# Altium PCB HEAD_HEATER_CTRL_2CH.PcbDoc
Units mm, origin at the board's own origin, x right, y up, seen from the top; angles counter-clockwise.
Board outline 65 x 60 mm, 2 copper layers (Top Layer, Bottom Layer); 46 components, 24 nets, 116 pads, 44 vias.
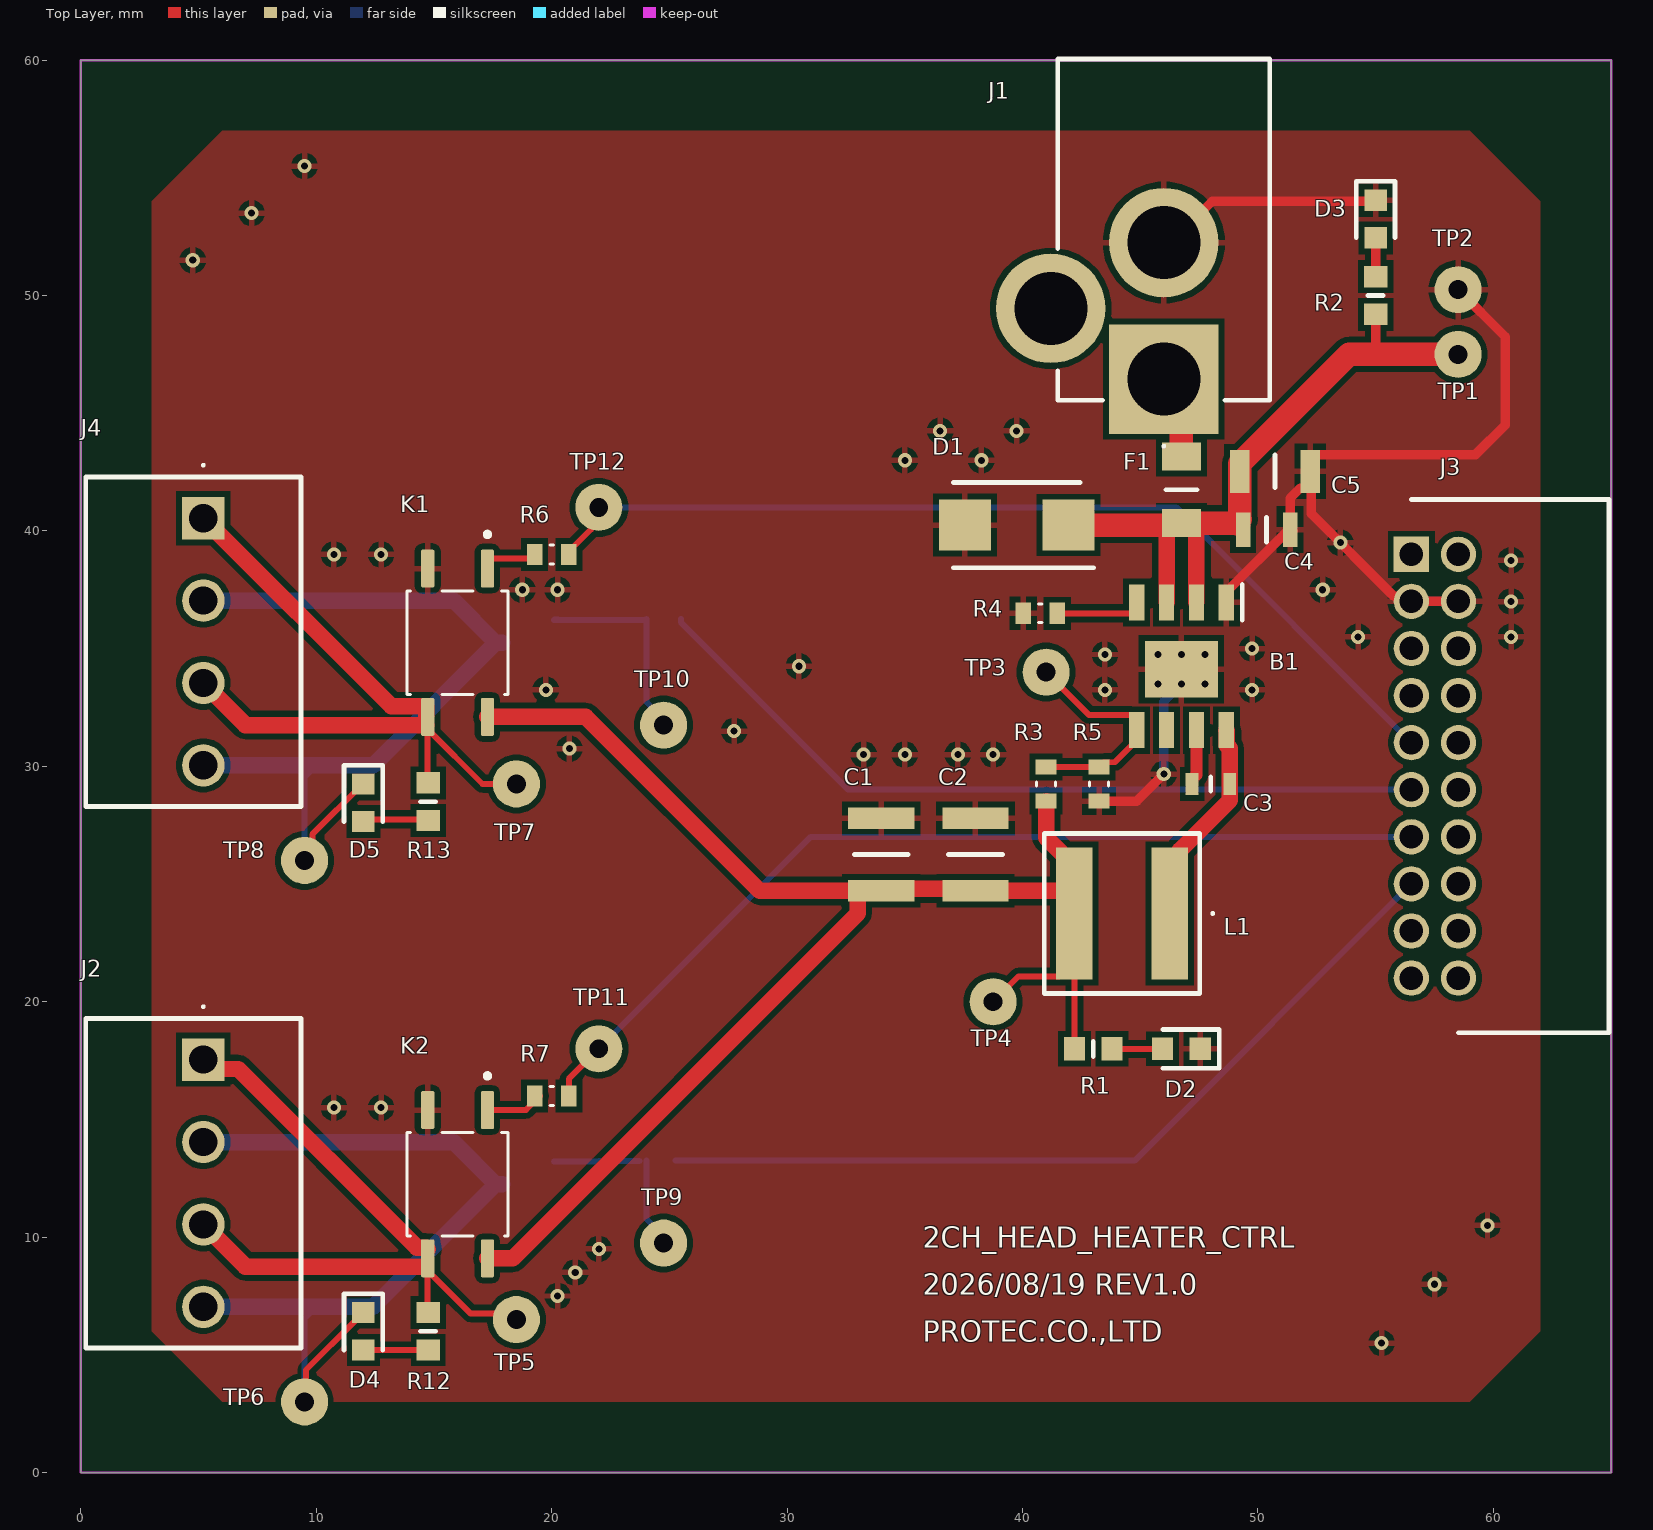
[diagram p0: Top Layer view]
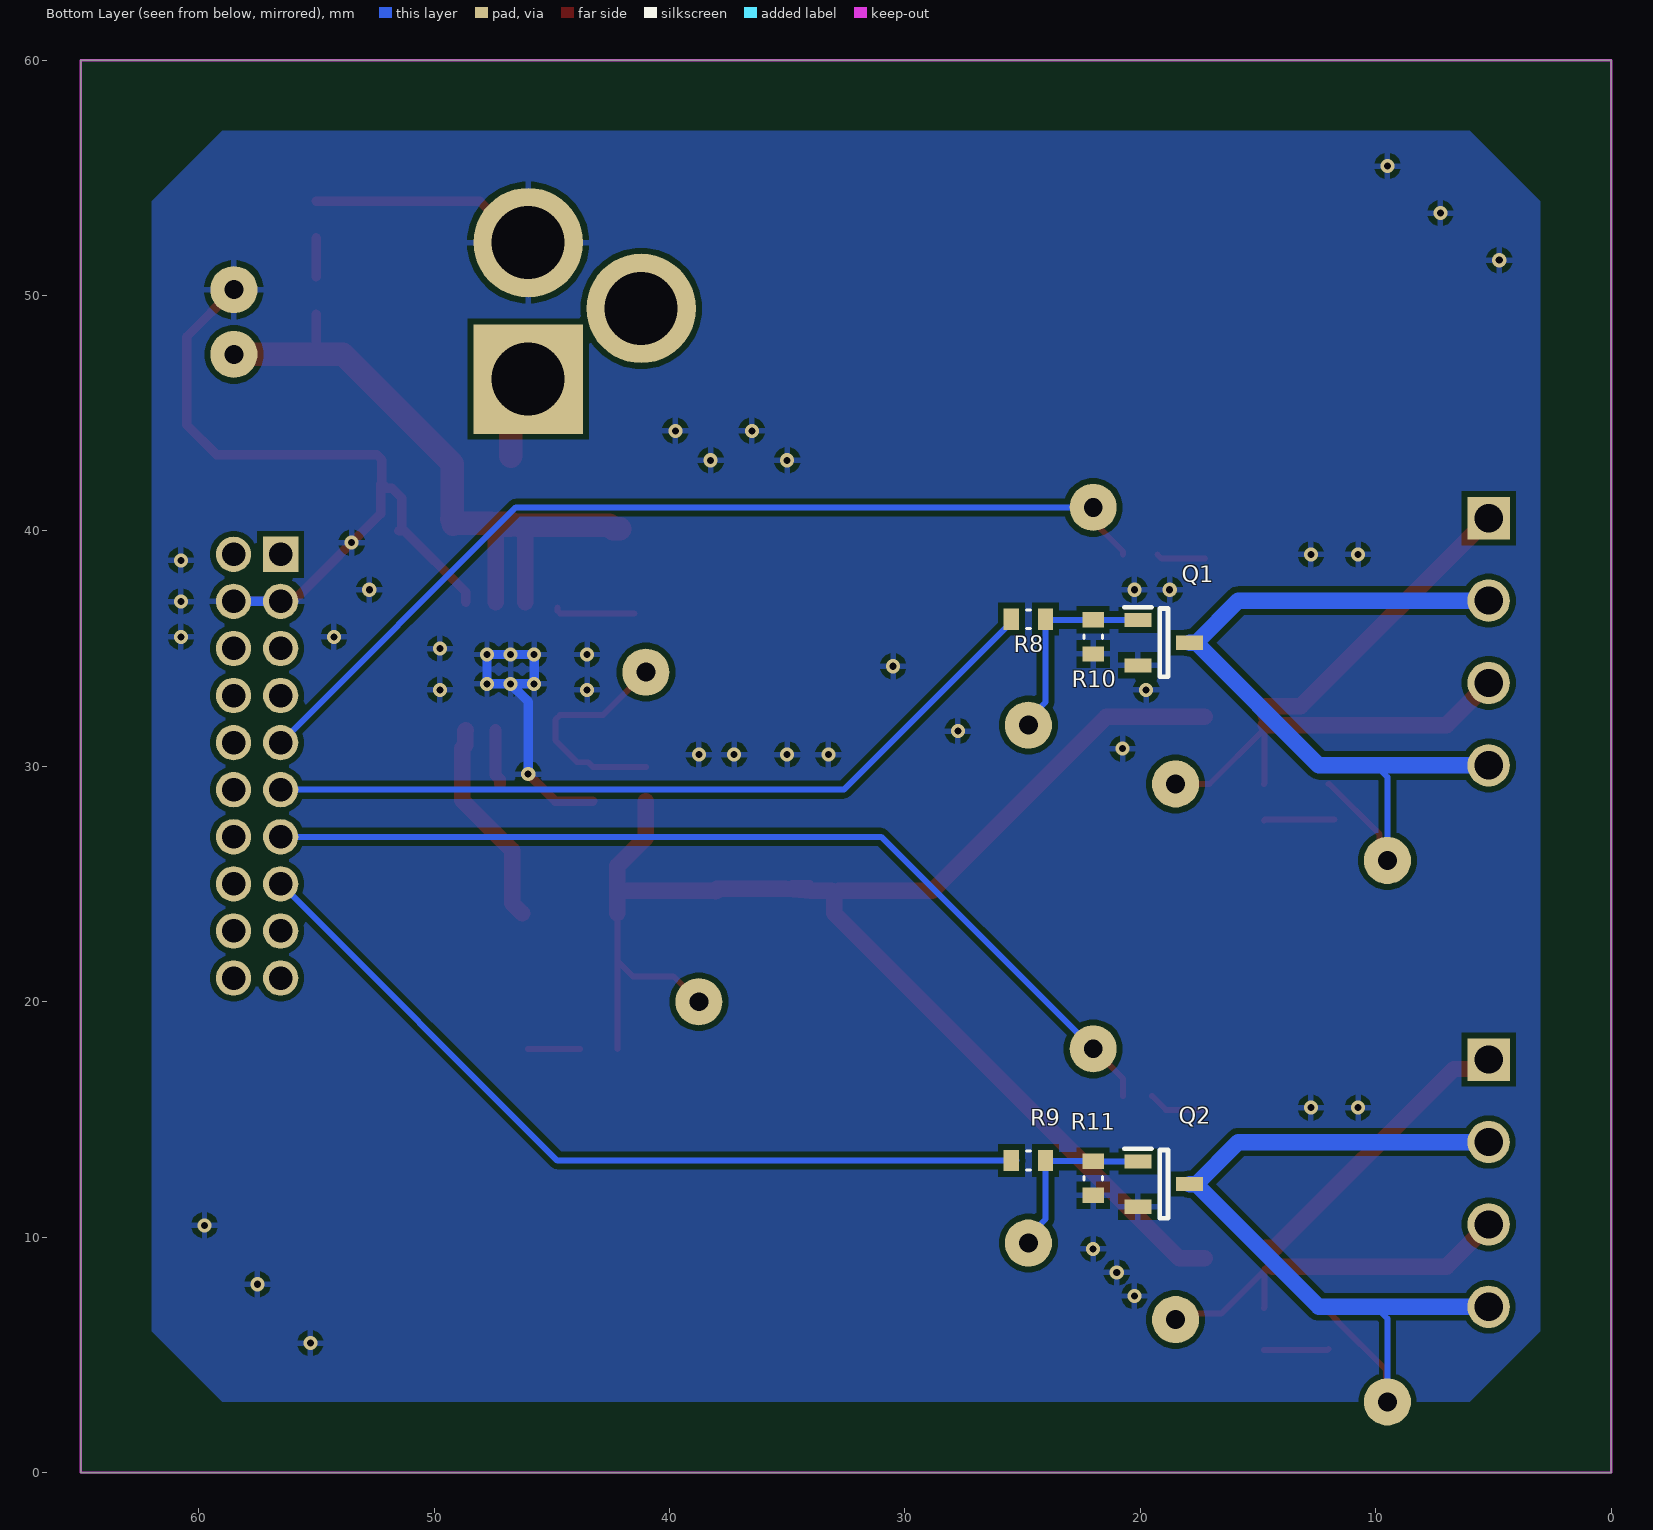
[diagram p1: Bottom Layer view, seen from below]
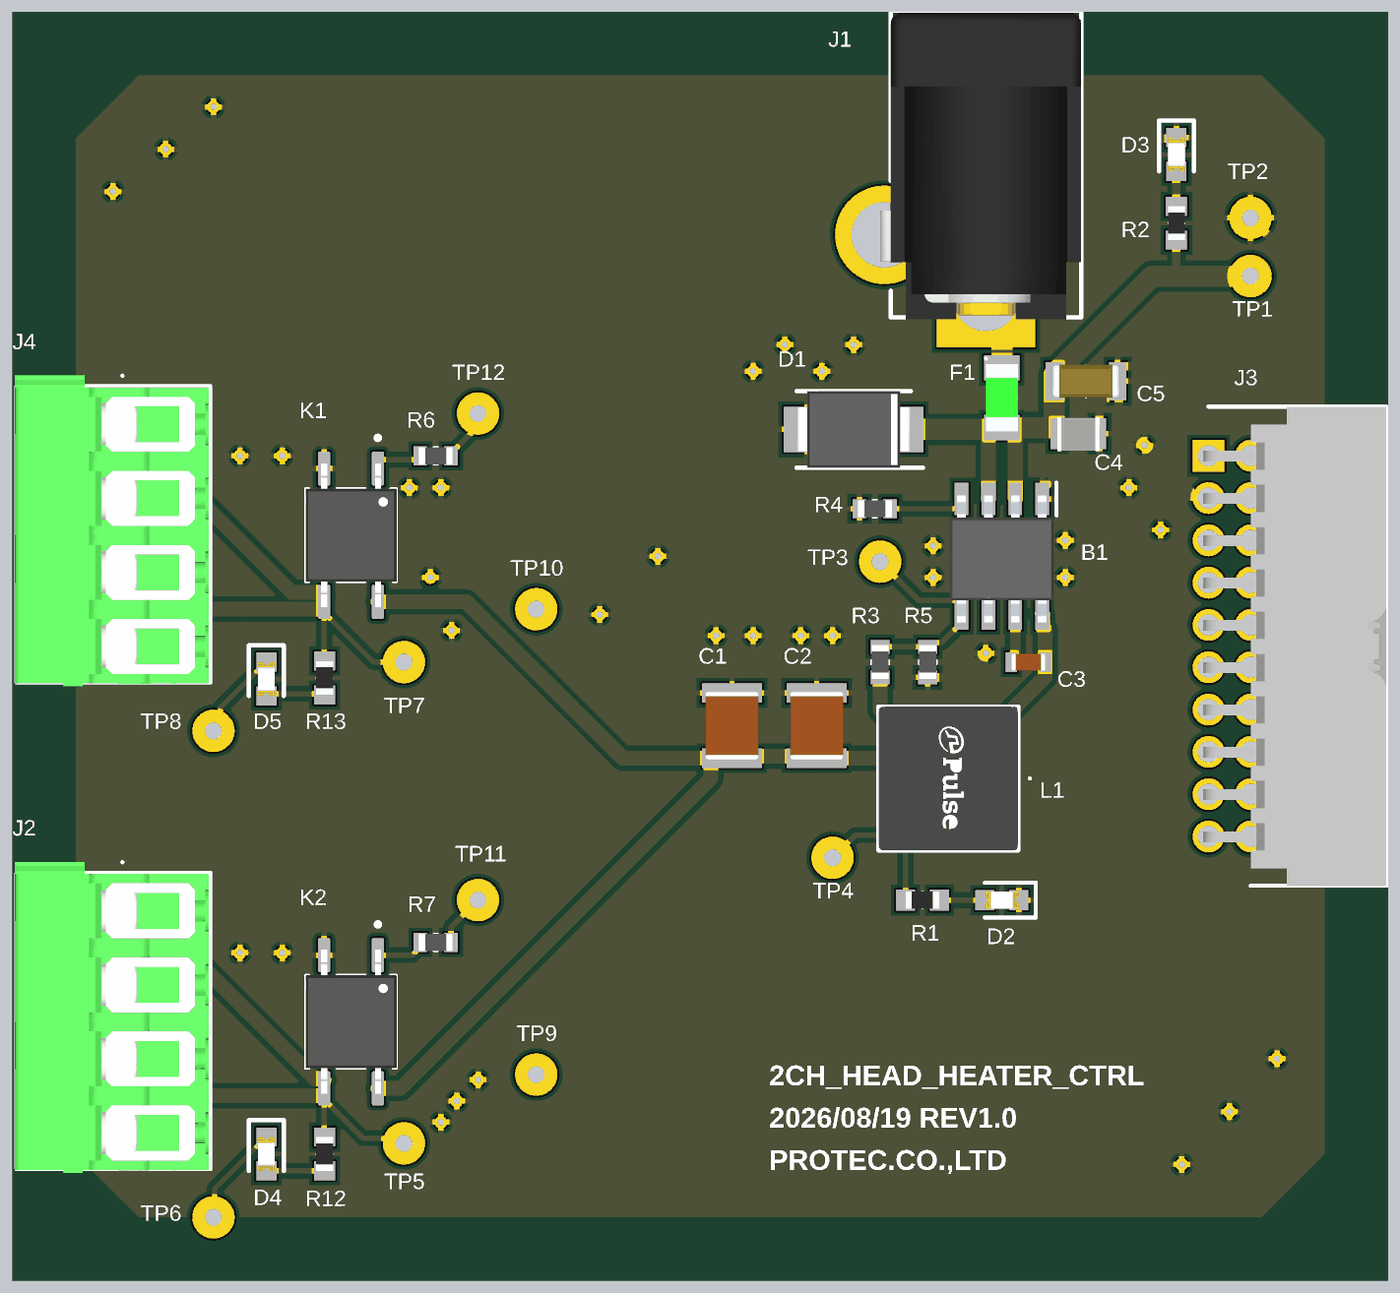
[diagram p2: 3D render of the assembled board from above, using the file's embedded part models]
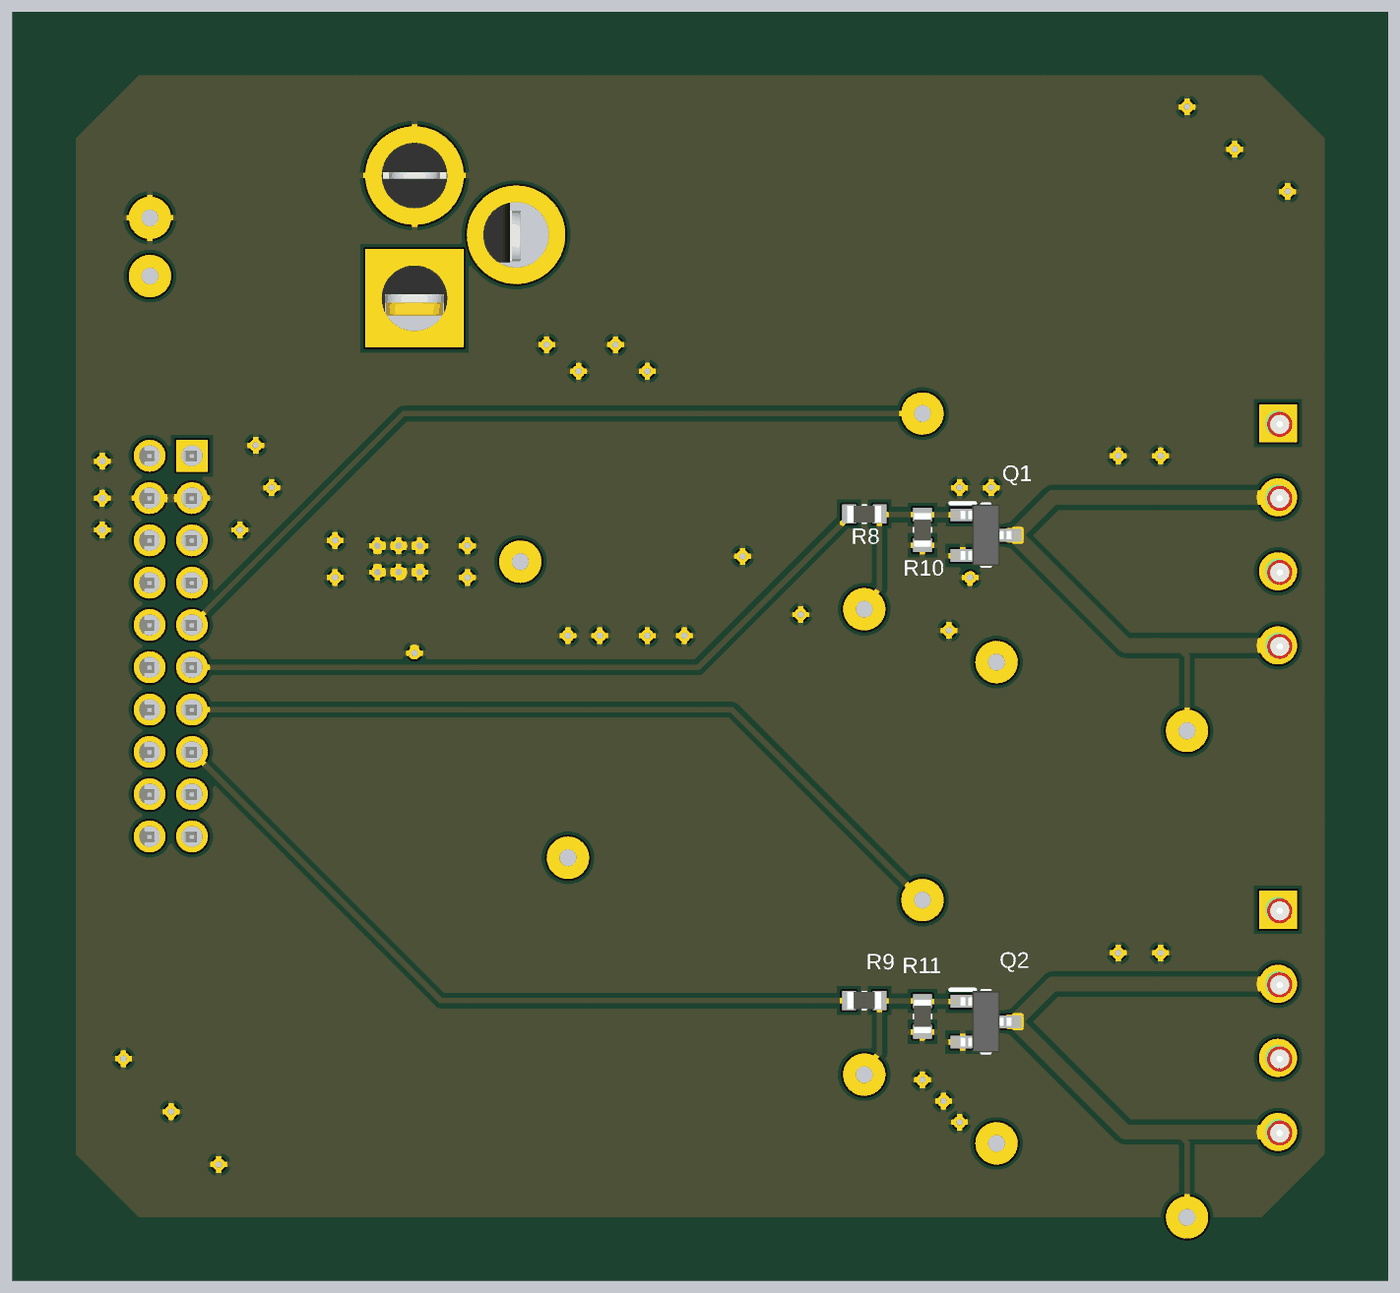
[diagram p3: 3D render of the assembled board from below, using the file's embedded part models]

## Layer stack, top to bottom
Top Solder: solder mask 0.0102, Solder Resist, Dk 3.5
Top Layer: signal copper 0.0356
Dielectric 1: dielectric 0.32, FR-4, Dk 4.8
Bottom Layer: signal copper 0.0356
Bottom Solder: solder mask 0.0102, Solder Resist, Dk 3.5

## Board outline
0,0 0,60 65,60 65,0

## Design rules (kind name [scope] priority, off if disabled: settings)
Clearance [All] p1: gap=0.24 ignorepadtopadclearanceinfootprint=FALSE
HoleSize [All] p1: absolutevalues=TRUE maxlimit=3.1 minlimit=0.025 maxpercent=80.000 minpercent=20.000
MinimumSolderMaskSliver [All] p1: minsoldermaskwidth=0.015
PolygonConnect [All] p1: connectstyle=Relief reliefconductorwidth=0.254 reliefentries=4 polygonreliefangle="90 Angle" airgapwidth=0.254
RoutingVias [All] p1: holewidth=0.711 width=1.27 viastyle="Through Hole" minholewidth=0.711 minwidth=1.27 maxholewidth=0.711 maxwidth=1.27
SilkToSolderMaskClearance [IsPad] p1: minsilkscreentomaskgap=0 clearancetoexposedcopper=TRUE
SolderMaskExpansion [All] p1: expansion=0.102 istentingtop=FALSE
Width [All] p1: maxlimit=1 minlimit=0.254 preferedwidth=0.254
27 further rules are at their usual default settings.

## Classes and differential pairs
component class POWER: B1 C1 C2 C3 C4 C5 D1 D2 D3 F1 J1 L1 R1 R2 R3 R4 R5 TP1 TP2 TP3 TP4
component class HEATER_CTRL: D4 D5 J2 J3 J4 K1 K2 Q1 Q2 R6 R7 R8 R9 R10 R11 R12 R13 TP5 TP6 TP7 TP8 TP9 TP10 TP11 TP12

## Components (designator, comment, footprint, x,y, rotation, side; value= is the part's Value field where it differs from the comment)
B1 "LMR38020FSDDAR" SOIC127P600X170-9N 46.75,34.25 r270 top
C1 "22µF 3225" CAPC3225X230N 34,26.25 r270 top
C2 "22µF 3225" CAPC3225X230N 38,26.25 r270 top
C3 "0.1uF 1608" CAPC1608X80N 48,29.25 r0 top
C4 "0.1uF 2012" CAPC2012X145N 50.366,40.055 r180 top
C5 "4.7uF 1206" CAPC3216X190N 50.72,42.53 r180 top
D1 "SMBJ28A" DIOM5436X261N 39.75,40.25 r180 top
D2 "LTST-C190KGKT" LEDC1608X80N 46.75,18 r180 top
D3 "LTST-C190KGKT" LEDC1608X80N 55,53.25 r270 top
D4 "LTST-C190KGKT" LEDC1608X80N 12,6 r270 top
D5 "LTST-C190KGKT" LEDC1608X80N 12,28.45 r270 top
F1 "0468001.NR" FUSC3215X76N 46.75,41.75 r270 top
J1 "694108301002" 694108301002 46,46.45 r270 top
J2 "1984785" 1984785 5.2,7 r90 top
J3 "87833-2020" SHDRRA20W55P200_2X10_2265X640X630P 56.515,39.006 r270 top
J4 "1984785" 1984785 5.2,30 r90 top
K1 "AQY212G3HSX" SOIC254P680X230-4N 16,35.25 r270 top
K2 "AQY212G3HSX" SOIC254P680X230-4N 16,12.25 r270 top
L1 "PM5432.223NLT 22uH" PM5432223NLT 44.225,23.75 r270 top
Q1 "DMN3042L-7" SOT96P240X115-3N 19,35.25 r180 bottom
Q2 "DMN3042L-7" SOT96P240X115-3N 19,12.25 r180 bottom
R1 "ERJ-3EKF6201V" RESC1608X55N 43,18 r180 top
R2 "11k 0603" RESC1608X55N 55,50 r270 top
R3 "100k 0603" RES_ERJ3EKF1003V 41,29.25 r270 top
R4 "64.9k 0603" RES_ERJ3EKF6492V 40.75,36.5 r0 top
R5 "7.68k 0603" RES_ERJ3EKF7681V 43.25,29.25 r90 top
R6 "330R 0603" RES_ERJ3EKF3300V 20,39 r180 top
R7 "330R 0603" RES_ERJ3EKF3300V 20,16 r180 top
R8 "100R 0603" RES_ERJ3EKF1000V 24.75,36.25 r180 bottom
R9 "100R 0603" RES_ERJ3EKF1000V 24.75,13.25 r180 bottom
R10 "10k 0603" RES_ERJ3EKF1002V 22,35.5 r90 bottom
R11 "10k 0603" RES_ERJ3EKF1002V 22,12.5 r90 bottom
R12 "ERJ-3EKF6201V" RESC1608X55N 14.75,6 r90 top
R13 "ERJ-3EKF6201V" RESC1608X55N 14.75,28.5 r90 top
TP1 "TP" TESTPOINT#1 58.5,47.5 r0 top
TP2 "TP" TESTPOINT#1 58.5,50.25 r0 top
TP3 "TP" TESTPOINT#1 41,34 r0 top
TP4 "TP" TESTPOINT#1 38.75,20 r0 top
TP5 "TP" TESTPOINT#2 18.25,6.25 r0 top
TP6 "TP" TESTPOINT#2 9.25,2.75 r0 top
TP7 "TP" TESTPOINT#3 17.75,29 r0 top
TP8 "TP" TESTPOINT#4 9,26.25 r0 top
TP9 "TP" TESTPOINT#1 24.75,9.75 r0 top
TP10 "TP" TESTPOINT#5 24.75,32 r90 top
TP11 "TP" TESTPOINT#1 22,18 r90 top
TP12 "TP" TESTPOINT#5 22,41.25 r90 top

## Footprints (in the part's own frame and the unit in brackets; to place one, negate y for a bottom-side part, rotate by r counter-clockwise, add the part's x,y. Pads: shape width x height; smd on the part's side, far side on the other; paste and mask are expansions set on the pad)
1984785 [mm]
  rect 1.8x1.8 hole 1.2: 1(10.541,0)
  round 1.8 hole 1.2: 2(7.041,0) 3(3.541,0) 4(0.041,0)
  silkscreen extent -1.71,-4.15 12.84,5, body extent -1.89,-4.07 12.81,5.08, height 7.55
694108301002 [mm]
  rect 4.65x4.65 hole 3.1: 1(0,0)
  round 4.65 hole 3.1: 2(-5.8,0) 3(-3,-4.8)
  silkscreen extent -13.6,-4.5 2.9,4.5, body extent -13.5,-5 1,4.5, height 10.68
CAPC1608X80N [mm]
  rect 0.54x0.94 smd: 1(-0.8,0) 2(0.8,0)
  silkscreen extent 0,-0.3 0,0.3, body extent -0.8,-0.4 0.8,0.4, height 0.8
CAPC2012X145N [mm]
  rect 0.62x1.47 smd: 1(-1,0) 2(1,0)
  silkscreen extent 0,-0.53 0,0.53, body extent -1,-0.76 1,0.84, height 1.22
CAPC3216X190N [mm]
  rect 0.82x1.82 smd: 1(-1.5,0) 2(1.5,0)
  silkscreen extent 0,-0.7 0,0.7, body extent -1.6,-0.8 1.6,0.8, height 1.9
CAPC3225X230N [mm]
  rect 0.92x2.82 smd: 1(-1.54,0) 2(1.54,0)
  silkscreen extent 0,-1.15 0,1.15, body extent -1.6,-1.25 1.6,1.25, height 2.5
DIOM5436X261N [mm]
  rect 2.2x2.15 smd: 1(-2.2,0) 2(2.2,0)
  silkscreen extent -3.27,-1.81 2.7,1.81, body extent -2.7,-1.81 2.7,1.81, height 2.6
FUSC3215X76N [mm]
  rect 1.2x1.67 smd: 1(-1.415,0) 2(1.415,0)
  silkscreen extent 0,-0.66 0,0.66, body extent -1.59,-0.76 1.59,0.76, height 0.76
LEDC1608X80N [mm]
  rect 0.9x0.95 smd: 1(-0.8,0) 2(0.8,0)
  silkscreen extent -1.6,-0.82 0.8,0.82, body extent -0.8,-0.4 0.8,0.4, height 0.77
PM5432223NLT [mm]
  rect 5.6x1.55 smd: 1(0,2.025) 2(0,-2.025)
  silkscreen extent -3.4,-3.3 3.4,3.9, body extent -3.4,-3.3 3.4,3.3, height 6.05
RES_ERJ3EKF1000V [mm]
  rect 0.65x0.9 smd: 1(-0.725,0) 2(0.725,0)
  silkscreen extent -0.08,-0.4 0.08,0.4, body extent -0.8,-0.4 0.8,0.4, height 0.45
RES_ERJ3EKF1002V [mm]
  rect 0.65x0.9 smd: 1(-0.725,0) 2(0.725,0)
  silkscreen extent -0.08,-0.4 0.08,0.4, body extent -0.8,-0.4 0.8,0.4, height 0.45
RES_ERJ3EKF1003V [mm]
  rect 0.65x0.9 smd: 1(-0.725,0) 2(0.725,0)
  silkscreen extent -0.08,-0.4 0.08,0.4, body extent -0.8,-0.4 0.8,0.4, height 0.45
RES_ERJ3EKF3300V [mm]
  rect 0.65x0.9 smd: 1(-0.725,0) 2(0.725,0)
  silkscreen extent -0.08,-0.4 0.08,0.4, body extent -0.8,-0.4 0.8,0.4, height 0.45
RES_ERJ3EKF6492V [mm]
  rect 0.65x0.9 smd: 1(-0.725,0) 2(0.725,0)
  silkscreen extent -0.08,-0.4 0.08,0.4, body extent -0.8,-0.4 0.8,0.4, height 0.45
RES_ERJ3EKF7681V [mm]
  rect 0.65x0.9 smd paste+0 mask+0.102: 1(-0.725,0) 2(0.725,0)
  silkscreen extent -0.08,-0.4 0.08,0.4, body extent -0.8,-0.4 0.8,0.4, height 0.45
RESC1608X55N [mm]
  rect 0.9x1 smd: 1(-0.8,0) 2(0.8,0)
  silkscreen extent 0,-0.32 0,0.32, body extent -0.8,-0.4 0.8,0.4, height 0.45
SHDRRA20W55P200_2X10_2265X640X630P [mm]
  rect 1.5x1.5 / inner round 1.5 / far side rect 1.5x1.5 hole 1: 1(0,0)
  round 1.5 hole 1: 2(0,2) 3(2,0) 4(2,2) 5(4,0) 6(4,2) 7(6,0) 8(6,2) 9(8,0) 10(8,2) 11(10,0) 12(10,2) 13(12,0) 14(12,2) 15(14,0) 16(14,2) 17(16,0) 18(16,2) 19(18,0) 20(18,2)
  silkscreen extent -2.32,0 20.33,8.4, body extent -2.31,-0.24 20.34,8.41, height 6.4
SOIC127P600X170-9N [mm]
  rect 1.525x0.65 smd: 1(-2.712,1.905) 2(-2.712,0.635) 3(-2.712,-0.635) 4(-2.712,-1.905) 5(2.712,-1.905) 6(2.712,-0.635) 7(2.712,0.635) 8(2.712,1.905)
  rect 2.4x3.1 smd: 9(0.127,0)
  silkscreen extent -3.47,2.58 -1.95,2.58, body extent -2.87,-2.45 3.13,2.45, height 1.7
SOIC254P680X230-4N [mm]
  rrect25% 1.61x0.57 smd paste+0 mask+0.102: 1(-3.15,1.27) 2(-3.15,-1.27) 3(3.15,-1.27) 4(3.15,1.27)
  silkscreen extent -4.7,-2.15 2.2,2.15, body extent -3.4,-2.15 3.4,2.15, height 2.3
SOT96P240X115-3N [mm]
  rect 1.15x0.6 smd: 1(-1.1,0.96) 2(-1.1,-0.96) 3(1.1,0)
  silkscreen extent -1.68,-1.45 0.18,1.51, body extent -1.2,-1.45 1.2,1.45, height 1.15
TESTPOINT#1 [mm]
  round 2 hole 0.8: 1(0,0)
TESTPOINT#2 [mm]
  round 2 hole 0.8: 1(0.25,0.25)
TESTPOINT#3 [mm]
  round 2 hole 0.8: 1(0.75,0.25)
TESTPOINT#4 [mm]
  round 2 hole 0.8: 1(0.5,-0.25)
TESTPOINT#5 [mm]
  round 2 hole 0.8: 1(-0.25,0)

## Part data
B1: "Switching Voltage Regulators SIMPLE SWITCHER power converter 4.2-V to 80-V, 2-A, synchronous buck with 40- uA IQ 8-SO PowerPAD -40 to 150", Manufacturer_Name="Texas Instruments", Mouser Part Number=595-LMR38020FSDDAR, Datasheet Link=https://www.ti.com/lit/ds/symlink/lmr38020.pdf?ts=1680684106501&ref_url=https%253A%252F%252Fwww.ti.com%252Fproduct%252FLMR38020%252Fpart-details%252FLMR38020FSDDAR, Geometry.Height=1.7mm, Manufacturer_Part_Number=LMR38020FSDDAR, Mouser Price/Stock=https://www.mouser.co.uk/ProductDetail/Texas-Instruments/LMR38020FSDDAR?qs=Li%252BoUPsLEntEBCY4Tfvw5g%3D%3D
C1 C2: library part C3225X7R1E226M250AB, "MULTILAYER CERAMIC CHIP CAPACITORS, 3225, Commercial grade, general (Up to 75V)", Manufacturer_Name=TDK, Mouser Part Number=810-C3225X7R1EM250AB, Datasheet Link=https://product.tdk.com/info/en/catalog/datasheets/mlcc_commercial_midvoltage_en.pdf, Geometry.Height=2.3mm, Manufacturer_Part_Number=C3225X7R1E226M250AB, Mouser Price/Stock=https://www.mouser.co.uk/ProductDetail/TDK/C3225X7R1E226M250AB?qs=gZXFycFWdAOxso2lxwRfpg%3D%3D
C3: library part C1608X7R1H104K080AA, "MULTILAYER CERAMIC CHIP CAPACITORS, 1608, Commercial grade, general (Up to 75V)", Manufacturer_Name=TDK, Mouser Part Number=810-C1608X7R1H104K, Datasheet Link=https://product.tdk.com/info/en/catalog/datasheets/mlcc_commercial_midvoltage_en.pdf, Geometry.Height=0.8mm, Manufacturer_Part_Number=C1608X7R1H104K080AA, Mouser Price/Stock=https://www.mouser.co.uk/ProductDetail/TDK/C1608X7R1H104K080AA?qs=NRhsANhppD8dEJli2CDBHA%3D%3D
C4: library part C2012X7R2A104K125AE, "Multilayer Ceramic Capacitors MLCC - SMD/SMT 2012 0.1uF 100volts X7R 10% Soft Term", Manufacturer_Name=TDK, Mouser Part Number=810-C2012X7R2A104KAE, Datasheet Link=https://product.tdk.com/info/en/catalog/datasheets/mlcc_commercial_midvoltage_en.pdf, Geometry.Height=1.45mm, Manufacturer_Part_Number=C2012X7R2A104K125AE, Mouser Price/Stock=https://www.mouser.co.uk/ProductDetail/TDK/C2012X7R2A104K125AE?qs=n%2FVzw7c4a0kn2AI72VWcwA%3D%3D
C5: library part CGA5L1X7R2A475K160AC, "Multilayer Ceramic Capacitors MLCC - SMD/SMT 1206 100VDC 4.7uF 10% 1.6mm AEC-Q200", Manufacturer_Name=TDK, Mouser Part Number=810-CGA5L7R2A475K160, Geometry.Height=1.9mm, Manufacturer_Part_Number=CGA5L1X7R2A475K160AC, Mouser Price/Stock=https://www.mouser.co.uk/ProductDetail/TDK/CGA5L1X7R2A475K160AC?qs=17ckDYBRdelJ4ksCO5KBeA%3D%3D
D1: "Littelfuse SMBJ28A Uni-Directional TVS Diode, 600W peak, 2-Pin DO-214AA", Manufacturer_Name=LITTELFUSE, Mouser Part Number=576-SMBJ28A, Datasheet Link=https://componentsearchengine.com/Datasheets/2/SMBJ28A.pdf, Geometry.Height=2.61mm, Manufacturer_Part_Number=SMBJ28A, Mouser Price/Stock=https://www.mouser.co.uk/ProductDetail/Littelfuse/SMBJ28A?qs=JJML70Qc14vmSTVTa1LvqQ%3D%3D
D2 D3 D4 D5: "Lite-On LTST-C190KGKT, 571 nm Green LED, 1608 (0603) SMD package", Manufacturer_Name=Lite-On, Mouser Part Number=859-LTST-C190KGKT, Geometry.Height=0.8mm, Manufacturer_Part_Number=LTST-C190KGKT, Mouser Price/Stock=https://www.mouser.co.uk/ProductDetail/Lite-On/LTST-C190KGKT?qs=205qCy6M2Q%252BAdcgwUZktqw%3D%3D
F1: "Surface Mount Fuses 1A Slo-Blo", Manufacturer_Name=LITTELFUSE, Mouser Part Number=576-0468001.NR, Datasheet Link=https://www.littelfuse.com/~/media/electronics/datasheets/fuses/littelfuse_fuse_468_datasheet.pdf.pdf, Geometry.Height=0.762mm, Manufacturer_Part_Number=0468001.NR, Mouser Price/Stock=https://www.mouser.co.uk/ProductDetail/Littelfuse/0468001.NR?qs=ar9f0rk5DXBYH1VlQUX7jA%3D%3D
J1: "WR-DCPJ_THT_R/A_Plastic DCPowerJack_THT_R/A_Plastic_CenterPin_ 2.5", Manufacturer_Name="Wurth Elektronik", Mouser Part Number=710-694108301002, Datasheet Link=https://www.we-online.com/catalog/datasheet/694108301002.pdf, Geometry.Height=11mm, Manufacturer_Part_Number=694108301002, Mouser Price/Stock=https://www.mouser.co.uk/ProductDetail/Wurth-Elektronik/694108301002?qs=a9WhcLg8qCwpBR6w1flhOw%3D%3D
J2 J4: "PT 1,5/ 4-3,5-V - Printed circuit board terminal, nominal current: 17.5 A, rated voltage (III/2): 200 V, nominal cross section: 1.5 mm<sup>2</sup>, number of potentials: 4, number of rows: 1, number of positions per row: 4, product range: PT 1,5/..-V, pitch: 3.5 mm, connection method: Screw connection with wire protector, screw head form: H1L Slotted Phillips recess, mounting: Wave soldering, conductor/PCB connection direction: 90 , color: green, Pin layout: Linear pinning, Solder pin [P]: 4.5 mm, number o", Manufacturer_Name="Phoenix Contact", Mouser Part Number=651-1984785, Datasheet Link=https://www.phoenixcontact.com/en-us/products/printed-circuit-board-terminal-pt-15-4-35-v-1984785?type=pdf, Geometry.Height=7.7mm, Manufacturer_Part_Number=1984785, Mouser Price/Stock=https://www.mouser.co.uk/ProductDetail/Phoenix-Contact/1984785?qs=MCbhYIqTEtldDub9XDF2qg%3D%3D
J3: "Milli-Grid 2.0mm Header rightangle 20way Molex 87833 Series, 2mm Pitch 20 Way 2 Row Right Angle PCB Header, Solder Termination, 2A", Manufacturer_Name=Molex, Mouser Part Number=538-87833-2020, Datasheet Link=https://www.molex.com/pdm_docs/sd/878332020_sd.pdf, Geometry.Height=6.3mm, Manufacturer_Part_Number=87833-2020, Mouser Price/Stock=https://www.mouser.co.uk/ProductDetail/Molex/87833-2020?qs=9Wl4wMk6NjqIn8s9c3rdaw%3D%3D
K1 K2: "Solid State Photo-Coupled Relay (Photorelay) SPST-NO (1 Form A) 4-SMD, Gull Wing", Package=None, Check_prices=https://www.snapeda.com/parts/AQY212G3HSX/Panasonic/view-part/?ref=eda, MF=Panasonic, MP=AQY212G3HSX, SnapEDA_Link=https://www.snapeda.com/parts/AQY212G3HSX/Panasonic/view-part/?ref=snap
L1: library part PM5432.223NLT, "Power Inductors - SMD 22uH 5A AEC-Q200 DCR=60.63mOhms 20%", Manufacturer_Name="Yageo Group", Mouser Part Number=673-PM5432.223NLT, Arrow Part Number=PM5432.223NLT, Arrow Price/Stock=https://www.arrow.com/en/products/pm5432.223nlt/pulse-electronics-corporation?region=nac, Datasheet Link=https://www.digikey.com/en/products/detail/pulse-electronics/PM5432-223NLT/13693997?s=N4IgTCBcDaIAoFkCsAWAzGAdGMaByAMgCogC6AvkA, Geometry.Height=6mm, Manufacturer_Part_Number=PM5432.223NLT, Mouser Price/Stock=https://www.mouser.co.uk/ProductDetail/Pulse-Electronics/PM5432.223NLT?qs=pUKx8fyJudA8Ps5Zqdw%2FMg%3D%3D
Q1 Q2: "MOSFET 30V N-Ch Enh Mode 26.5mOhm 10V 5.8A", Manufacturer_Name="Diodes Incorporated", Mouser Part Number=621-DMN3042L-7, Datasheet Link=https://www.diodes.com//assets/Datasheets/DMN3042L.pdf, Geometry.Height=1.15mm, Manufacturer_Part_Number=DMN3042L-7, Mouser Price/Stock=https://www.mouser.co.uk/ProductDetail/Diodes-Incorporated/DMN3042L-7?qs=BvpHGKeVh3rQK2Uscu7jEw%3D%3D
R1 R12 R13: "Precision Thick Film Chip Resistor, 0603, 0.1W", Manufacturer_Name=Panasonic, Mouser Part Number=667-ERJ-3EKF6201V, Datasheet Link=http://industrial.panasonic.com/cdbs/www-data/pdf/RDA0000/AOA0000C86.pdf, Geometry.Height=0.55mm, Manufacturer_Part_Number=ERJ-3EKF6201V, Mouser Price/Stock=https://www.mouser.co.uk/ProductDetail/Panasonic/ERJ-3EKF6201V?qs=iBwFsHVUAOd2VkgAcHpNRw%3D%3D
R2: library part ERJ-3EKF1102V, "Precision Thick Film Chip Resistor, 0603, 0.1W", Manufacturer_Name=Panasonic, Mouser Part Number=667-ERJ-3EKF1102V, Datasheet Link=http://industrial.panasonic.com/cdbs/www-data/pdf/RDA0000/AOA0000C86.pdf, Geometry.Height=0.55mm, Manufacturer_Part_Number=ERJ-3EKF1102V, Mouser Price/Stock=https://www.mouser.co.uk/ProductDetail/Panasonic/ERJ-3EKF1102V?qs=iBwFsHVUAOdsgJapSwaPfA%3D%3D
R3: library part ERJ3EKF1003V, "Res Thick Film 0603 100K Ohm 1% 0.1W(1/10W) 100ppm/C Pad SMD Automotive T/R", Package="1608-2 Panasonic", Check_prices=https://www.snapeda.com/parts/ERJ-3EKF1003V/Panasonic+Electronic+Components/view-part/?ref=eda, MF=Panasonic, MP=ERJ-3EKF1003V, SnapEDA_Link=https://www.snapeda.com/parts/ERJ-3EKF1003V/Panasonic+Electronic+Components/view-part/?ref=snap
R4: library part ERJ3EKF6492V, Package=None, Availability=Unavailable, MF="{'manufacturer': u'Panasonic Electronic Components'}", MP=ERJ3EKF6492V, Price=None
R5: library part ERJ3EKF7681V, "Res Thick Film 1.6 x 0.8 mm 7.68K Ohm 1% 0.1W(1/10W) 100ppm/ C Molded SMD Punched Carrier T/R", Package="1608-2 Panasonic", Check_prices=https://www.snapeda.com/parts/ERJ3EKF7681V/Panasonic/view-part/?ref=eda, MF=Panasonic, MP=ERJ3EKF7681V, SnapEDA_Link=https://www.snapeda.com/parts/ERJ3EKF7681V/Panasonic/view-part/?ref=snap
R6 R7: library part ERJ3EKF3300V, "Res Thick Film 0603 330 Ohm 1% 0.1W(1/10W) 100ppm/C Molded SMD Punched Carrier T/R", Package="1608-2 Panasonic", Check_prices=https://www.snapeda.com/parts/ERJ-3EKF3300V/Panasonic+Electronic+Components/view-part/?ref=eda, MF=Panasonic, MP=ERJ-3EKF3300V, SnapEDA_Link=https://www.snapeda.com/parts/ERJ-3EKF3300V/Panasonic+Electronic+Components/view-part/?ref=snap
R8 R9: library part ERJ3EKF1000V, "100 Ohms 1% 0.1W, 1/10W Chip Resistor 0603 (1608 Metric) Automotive AEC-Q200 Thick Film", Package="1608-2 Panasonic", Check_prices=https://www.snapeda.com/parts/ERJ-3EKF1000V/Panasonic+Electronic+Components/view-part/?ref=eda, MF=Panasonic, MP=ERJ-3EKF1000V, SnapEDA_Link=https://www.snapeda.com/parts/ERJ-3EKF1000V/Panasonic+Electronic+Components/view-part/?ref=snap
R10 R11: library part ERJ3EKF1002V, "10 kOhms 1% 0.1W, 1/10W Chip Resistor 0603 (1608 Metric) Automotive AEC-Q200 Thick Film", Package="1608-2 Panasonic", Check_prices=https://www.snapeda.com/parts/ERJ-3EKF1002V/Panasonic+Electronic+Components/view-part/?ref=eda, MF=Panasonic, MP=ERJ-3EKF1002V, SnapEDA_Link=https://www.snapeda.com/parts/ERJ-3EKF1002V/Panasonic+Electronic+Components/view-part/?ref=snap

## Via types
v1: diameter 0.6, hole 0.3, Top Layer to Bottom Layer, 44 vias

## Nets (pads, with @x,y where several pads share a name; then routed paths per layer and width w, separated by ;. In a path a pad name is that pad's centre, name@x,y a point inside that pad or via, vN(x,y) a via of type N, cw(c..) or ccw(c..) an arc to the next point about the centre after c; other vN are vias at no path point)
14V_HEATER: C1.2 C2.2 K1.4 K2.4 L1.2 R1.2 R3.2 TP4.1 | length 66.7
  Top Layer w0.254: C1.2@34,25.043 34.817,25.043 C1.2@35.06,24.8 ; TP4.1 39.827,21.077 41.552,21.077 L1.2@42.2,21.725 ; R1.2 42.2,18.05 L1.2@42.2,21.725 ; L1.2 L1.2@42.2,21.725
  Top Layer w0.7: K2.4 18.35,9.1 33.003,23.753 33.003,24.6 33.113,24.71 C1.2 35.06,24.8 C2.2@38,24.8 ; K1.4 21.443,32.1 28.833,24.71 C1.2@32.8,24.71 ; C2.2@38.024,24.686 C2.2 41.96,24.71 L1.2@42,24.75 ; R3.2 41,26.975 42.207,25.768 L1.2@42.207,23.757
24V_IN: B1.2 B1.3 C4.2 C5.2 D1.1 F1.2 R2.2 TP1.1 | length 29.3
  Top Layer w0.254: D1.1 D1.1@42.115,40.085
  Top Layer w0.4: 55,48 R2.2
  Top Layer w0.5: F1.2@47.235,40.335 F1.2@47.585,40.335
  Top Layer w0.7: B1.3 46.115,39.935 46.43,40.25 46.515,40.335 F1.2 ; F1.2@46.735,40.085 47.235,40.085 47.385,39.935 B1.2
  Top Layer w1: D1.1@42.115,40.085 42.385,40.085 42.55,40.25 F1.2@46.43,40.25 ; F1.2 F1.2@47.235,40.335 ; F1.2@47.585,40.335 49.132,40.335 C4.2@49.176,40.29 ; C4.2@49.25,40.5 49.22,40.53 C5.2 49.22,42.85 53.869,47.5 TP1.1
24V_RAW: F1.1 J1.1 | length 3.6
  Top Layer w1: J1.1 46.75,45.7 F1.1
BOOT: B1.7 C3.1 | length 2.4
  Top Layer w0.5: C3.1 47.2,29.45 47.385,29.635 B1.7
FB: B1.5 R3.1 R5.2 TP3.1 | length 11.1
  Top Layer w0.254: TP3.1@40.25,33.75 TP3.1@41.5,33.75 ; R3.1 R5.2 43.448,30.173 43.918,30.173 44.845,31.1 44.845,31.975 44.647,32.173 42.827,32.173 TP3.1
GND: B1.1 B1.9 C1.1 C2.1 C4.1 C5.1 D1.2 D2.1 D3.1 J1.2 J3.3 J3.4 K1.2 K2.2 Q1.2 Q2.2 R4.1 R5.1 R10.1 R11.1 TP2.1 | length 57.6
  Top Layer w0.254: J3.4@58.494,37.006 J3.4@58.5,37
  Top Layer w0.4: R5.1 44.852,28.525 v1(46,29.673) ; J1.2 46.305,52.25 48.055,54 D3.1@55,54 ; B1.1 48.655,37.4 51.255,40 C4.1@51.5,40 ; C4.1 51.366,41.39 51.796,41.82 52.01,41.82 C5.1@52.22,42.03 ; J3.3@56.5,37.25 56.466,37.216 55.784,37.216 52.266,40.734 52.266,41.984 C5.1@52.22,42.03 ; J3.3 J3.4@58.494,37.006 ; TP2.1 60.5,48.25 60.5,44.5 59.24,43.24 52.43,43.24 52.22,43.03 C5.1 C5.1@52.22,42.03
  Bottom Layer w0.4: v1(45.75,33.5) v1(46.75,33.5) ; v1@45.75,33.75 v1(45.75,34.75) v1(46.75,34.75) v1(47.75,34.75) v1(47.75,33.5) v1(46.75,33.5) ; v1(46,29.673) 46,32.75 v1(46.75,33.5) ; J3.3 58.494,37.006 J3.4@58.5,37
  other v1: 55.25,5.5 20.25,7.5 57.5,8 21,8.5 22,9.5 59.75,10.5 10.75,15.5 12.75,15.5 33.25,30.5 35,30.5 37.25,30.5 38.75,30.5 20.75,30.75 27.75,31.5 19.75,33.25 43.5,33.25 49.75,33.25 30.5,34.25 43.5,34.75 49.75,35 54.25,35.5 60.75,35.5 60.75,37 18.75,37.5 20.25,37.5 52.75,37.5 60.75,38.75 10.75,39 12.75,39 53.5,39.5 35,43 38.25,43 36.5,44.25 39.75,44.25 4.75,51.5 7.25,53.5 9.5,55.5
H1_GATE: Q2.1 R9.2 R11.2 TP9.1 | length 7.4
  Bottom Layer w0.254: Q2.1 20.108,13.218 R11.2@21.968,13.218 ; R11.2 R9.2@23.725,13.225 ; R9.2 24.025,10.768 24.75,10.043 TP9.1
H2_GATE: Q1.1 R8.2 R10.2 TP10.1 | length 8.9
  Bottom Layer w0.254: Q1.1@20.283,36.217 21.992,36.217 R10.2 24,36.225 R8.2 24.025,32.728 24.75,32.003 TP10.1 ; Q1.1@20.29,36.21 Q1.1@20.27,36.23 ; Q1.1@20.27,36.23 20.25,36.21 Q1.1 20.12,36.23 Q1.1@20.27,36.23
HEAD1_HEATER+: J2.1 J2.3 K2.3 R12.2 TP5.1 | length 29.5
  Top Layer w0.254: J2.3@5.25,10.491 J2.3@5.25,11 ; R12.2@14.75,7 14.73,7.02 14.73,8.651 14.73,8.58 16.56,6.75 TP5.1@18.5,6.75
  Top Layer w0.7: J2.1 5.598,17.143 6.687,17.143 14.275,9.555 14.665,9.555 K2.3@14.73,9.49 ; J2.3@5.25,10.491 6.991,8.75 14.38,8.75
HEAD1_HEATER-: D4.1 J2.2 J2.4 Q2.3 TP6.1 | length 37.1
  Top Layer w0.254: TP6.1 9.556,3.056 9.556,4.356 11.652,6.452 11.652,6.477 11.975,6.8 D4.1
  Bottom Layer w0.254: TP6.1 9.5,6.541 10,7.041
  Bottom Layer w0.7: J2.4@5.25,7 5.291,7.041 10,7.041 12.416,7.041 Q2.3@17.625,12.25 ; J2.2@5.25,14 5.291,14.041 15.834,14.041 Q2.3@17.625,12.25 ; Q2.3 Q2.3@17.625,12.25
HEAD1_HEATER_CTRL: J3.15 R9.1 | length 36.1
  Bottom Layer w0.254: R9.1@25.25,13.25 44.759,13.25 J3.15
HEAD1_OVT_OK: J3.13 R7.1 TP11.1 | length 40.7
  Top Layer w0.254: R7.1 20.725,16.725 TP11.1
  Bottom Layer w0.254: TP11.1@22,18.25 22.25,18.25 31.006,27.006 J3.13
HEAD2_HEATER+: J4.1 J4.3 K1.3 R13.2 TP7.1 | length 31.2
  Top Layer w0.254: K1.3 14.73,29.27 R13.2@14.75,29.25 ; K1.3@14.75,32 14.75,31.56 17.06,29.25 TP7.1
  Top Layer w0.7: J4.3@5.25,33.5 5.25,33.491 6.991,31.75 K1.3@14.665,31.75 ; J4.1@5.25,40.491 13.192,32.549 14.665,32.549 K1.3@14.665,32.165
HEAD2_HEATER-: D5.1 J4.2 J4.4 Q1.3 TP8.1 | length 36.5
  Top Layer w0.254: TP8.1 9.834,26.334 9.834,27.109 11.975,29.25 D5.1
  Bottom Layer w0.254: TP8.1 9.5,29.541 10,30.041
  Bottom Layer w0.7: J4.4@5.25,30 5.291,30.041 10,30.041 12.416,30.041 Q1.3@17.625,35.25 ; J4.2@5.25,37 5.291,37.041 15.834,37.041 Q1.3@17.625,35.25 ; Q1.3 Q1.3@17.625,35.25
HEAD2_HEATER_CTRL: J3.11 R8.1 | length 34.1
  Bottom Layer w0.254: R8.1@25.5,36.25 25.5,36.1 32.594,29.006 J3.11
HEAD2_OVT_OK: J3.9 R6.1 TP12.1 | length 41.3
  Top Layer w0.254: R6.1 20.725,39.125 21.666,40.066 21.666,40.666 TP12.1
  Bottom Layer w0.254: TP12.1@22,41.25 22.25,41 46.521,41 J3.9
NetB1_4: B1.4 R4.2 | length 3.5
  Top Layer w0.254: R4.2 44.647,36.5 44.75,36.603 B1.4@44.75,36.75
NetD2_2: D2.2 R1.1 | length 2.2
  Top Layer w0.254: R1.1 D2.2 D2.2@46,18
NetD3_2: D3.2 R2.1 | length 1.6
  Top Layer w0.4: R2.1 D3.2
NetD4_2: D4.2 R12.1 | length 2.8
  Top Layer w0.254: D4.2@12,5.25 12.05,5.2 R12.1
NetD5_2: D5.2 R13.1 | length 3
  Top Layer w0.254: D5.2@11.75,27.75 14.7,27.75 R13.1
NetK1_1: K1.1 R6.2 | length 2.1
  Top Layer w0.254: K1.1@17.25,38.822 19.097,38.822 R6.2
NetK2_1: K2.1 R7.2 | length 2.5
  Top Layer w0.254: K2.1 18.9,15.4 R7.2@19.5,16
SW: B1.8 C3.2 L1.1 | length 8.9
  Top Layer w0.7: L1.1 46.675,24.175 46.675,26.425 48.8,28.55 C3.2 48.8,30.77 48.68,30.89 48.68,31.513 B1.8
pads on no net: B1.6 J1.3 J3.1 J3.2 J3.5 J3.6 J3.7 J3.8 J3.10 J3.12 J3.14 J3.16 J3.17 J3.18 J3.19 J3.20

## Polygon pours and split planes (outlines as drawn)
GND on Top Layer "GND_L01_P001" (solid, remove dead copper, pour order 1): 3,57 3,3 62,3 62,57
GND on Bottom Layer "GND_L02_P000" (solid, remove dead copper, pour order 0): 3,57 3,3 62,3 62,57

## Keep-outs
Keep-Out Layer:
  the board outline again, w0.1

## Other copper
Top Layer:
  pour cut-out: 59,57 62,54 62,57
  pour cut-out: 62,6 59,3 62,3
  pour cut-out: 6,3 3,6 3,3
  pour cut-out: 6,57 3,54 3,57
Bottom Layer:
  pour cut-out: 59,57 62,54 62,57
  pour cut-out: 62,6 59,3 62,3
  pour cut-out: 6,3 3,6 3,3
  pour cut-out: 6,57 3,54 3,57

## Silkscreen, mask and mechanical layers (free items; w line width, h text height)
Top Overlay:
  text "2CH_HEAD_HEATER_CTRL" at 35.75,9.25 h1.52
  text "2026/08/19 REV1.0" at 35.75,7.25 h1.52
  text "PROTEC.CO.,LTD" at 35.75,5.25 h1.52

## Dimensions
65,60 to 65,0 on Drill Guide
0,60 to 65,60 on Drill Guide